# Altium PCB EMG_shield_commref.PcbDoc
Units mm, origin at the board's own origin, x right, y up, seen from the top; angles counter-clockwise.
Board outline 19.53 x 19.54 mm, 4 copper layers (Top Layer, SIG1, SIG2, Bottom Layer), stack 0.886 mm thick; 2 components, 22 nets, 90 pads, 158 vias.
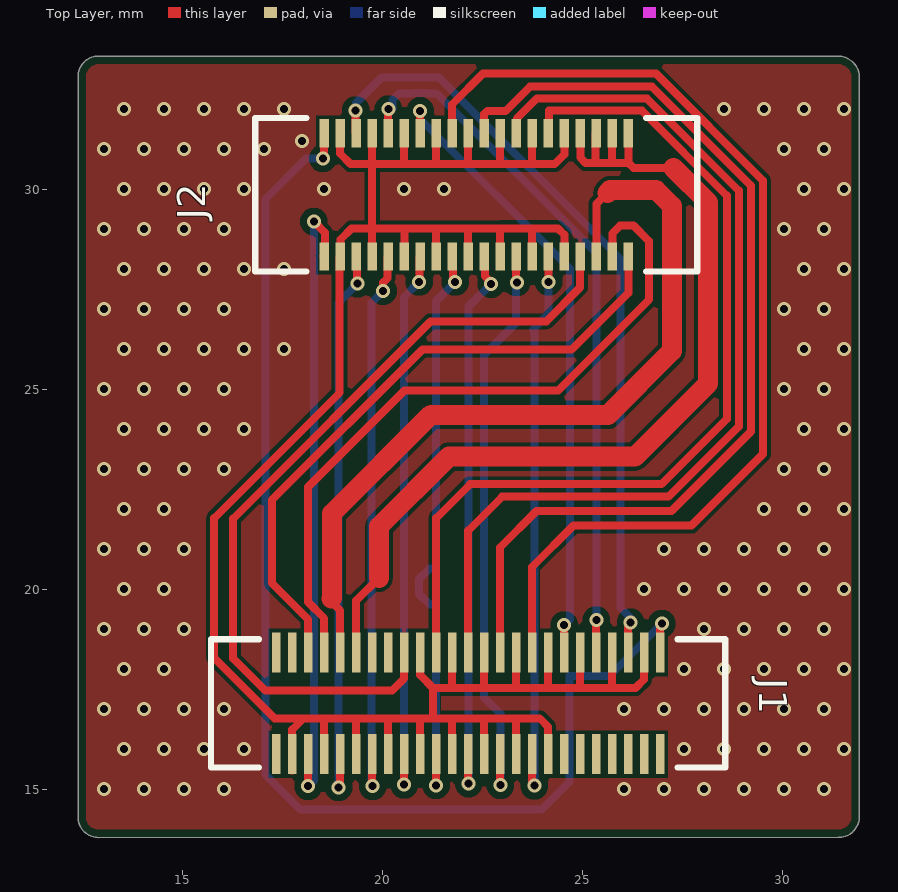
[diagram p0: Top Layer view]
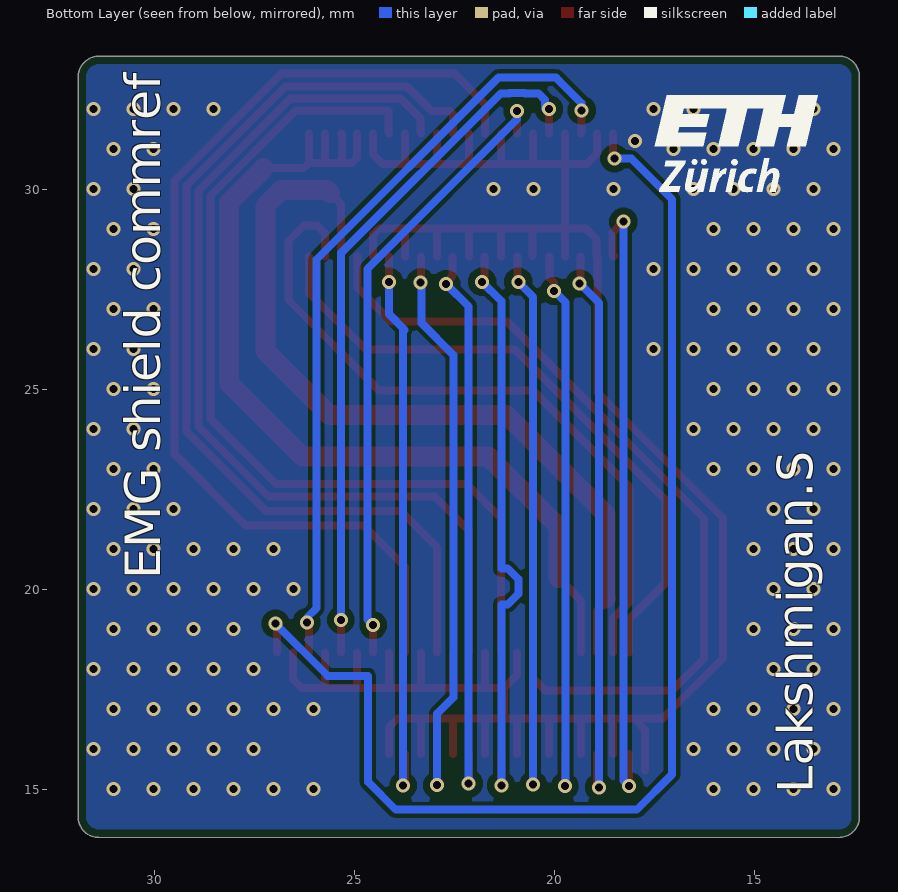
[diagram p1: Bottom Layer view, seen from below]
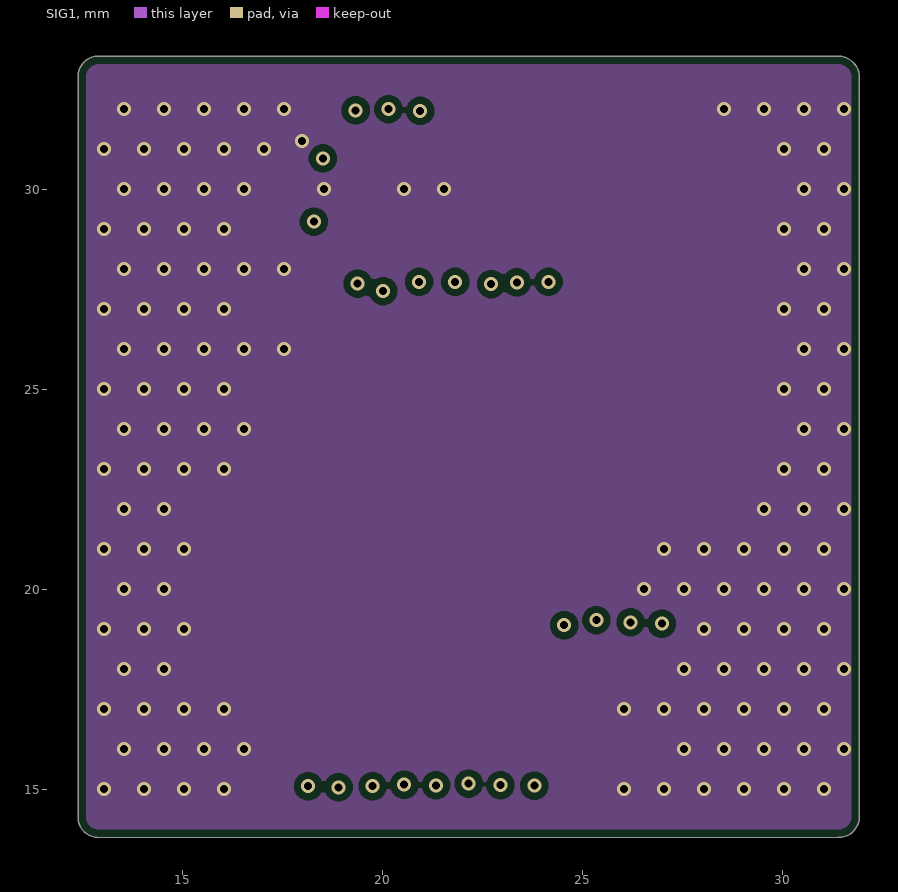
[diagram p2: SIG1]
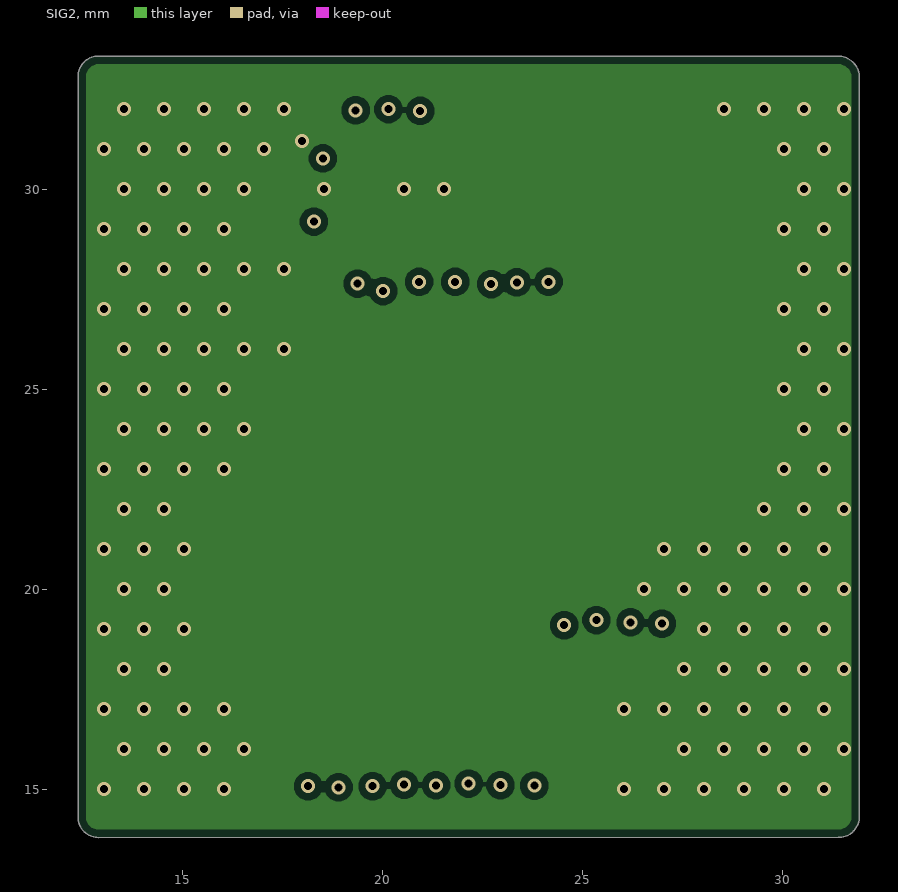
[diagram p3: SIG2]

## Layer stack, top to bottom
Top Solder: solder mask 0.0102, Solder Resist, Dk 3.5
Top Layer: signal copper 0.0175
Dielectric1: prepreg 0.13, PP-021, Dk 4.27
Dielectric2: core 0.13, Core-023, Dk 4.6
SIG1: signal copper 0.0356
Dielectric 1: prepreg 0.13, PP-021, Dk 4.27
Dielectric 2: prepreg 0.13, PP-021, Dk 4.27
SIG2: signal copper 0.0356
Dielectric 3: core 0.13, Core-023, Dk 4.6
Dielectric 4: prepreg 0.13, PP-021, Dk 4.27
Bottom Layer: signal copper 0.0175
Board Layer Stack Bottom Solder: solder mask 0.0102, Solder Resist, Dk 3.5

## Board outline
12.388,32.822 cw(c12.9,32.822) 12.9,33.334 31.389,33.334 cw(c31.389,32.803) 31.92,32.802 31.92,14.314 cw(c31.402,14.317) 31.399,13.799 12.9,13.797 cw(c12.896,14.304) 12.388,14.3

## Design rules (kind name [scope] priority, off if disabled: settings)
BoardOutlineClearance [All] p1: gap=0.2 ignorepadtopadclearanceinfootprint=FALSE
Clearance [All] p1: gap=0.102 ignorepadtopadclearanceinfootprint=FALSE except(0.127: Arc-Via Track-Via SMDPad-Via THPad-Via Via-Via Via-Fill Via-Poly Via-Region Via-Text; 0.25: Arc-Hole Track-Hole SMDPad-Hole THPad-Hole Via-Hole Fill-Hole Poly-Hole Region-Hole Text-Hole)
ComponentClearance [All] p1: gap=0.102 collisioncheckmode=3 verticalgap=0.102 showdistances=TRUE
DiffPairsRouting [All] p1: maxlimit=0.102 minlimit=0.102 mostfreqgap=0.102 toplayer_minwidth=0.102 toplayer_maxwidth=1816.048 toplayer_prefwidth=0.102 midlayer1_minwidth=0.102 midlayer1_maxwidth=1816.048 midlayer1_prefwidth=0.102 midlayer2_minwidth=0.102 midlayer2_maxwidth=1816.048 midlayer2_prefwidth=0.102 bottomlayer_minwidth=0.102 bottomlayer_maxwidth=1816.048 bottomlayer_prefwidth=0.102 maxuncoupledlength=12.7
Height [All] p1: minheight=0 maxheight=1816.048 prefheight=12.7
HoleSize [All] p1: absolutevalues=TRUE maxlimit=6.3 minlimit=0.2 maxpercent=80.000 minpercent=20.000
HoleToHoleClearance [All] p1: gap=0.25 allowstackedmicrovias=FALSE
MinimumAnnularRing [All] p1: minimumring=0.074
MinimumSolderMaskSliver [All] p1: minsoldermaskwidth=0
PlaneClearance [All] p1: clearance=0.102
PlaneConnect PlaneConnectPowerPads [InPadClass('PowerPads')] p1: planeconnectstyle=Direct reliefexpansion=0.508 reliefentries=4 reliefconductorwidth=0.254 reliefairgap=0.254
PlaneConnect [All] p2: pad.planeconnectstyle=Relief pad.reliefexpansion=0.3 pad.reliefentries=4 pad.reliefconductorwidth=0.102 pad.reliefairgap=0.102 via.planeconnectstyle=Direct via.reliefexpansion=0.3 via.reliefentries=4 via.reliefconductorwidth=0.127 via.reliefairgap=0.127
PolygonConnect PolygonConnectPowerPads [All vs (InPadClass('PowerPads'))] p1: connectstyle=Direct reliefconductorwidth=0.254 reliefentries=4 polygonreliefangle="90 Angle" airgapwidth=0.254
PolygonConnect [All] p2: thpad.connectstyle=Relief thpad.reliefconductorwidth=0.102 thpad.reliefentries=4 thpad.polygonreliefangle="90 Angle" thpad.airgapwidth=0.102 smdpad.connectstyle=Relief smdpad.reliefconductorwidth=0.102 smdpad.reliefentries=4 smdpad.polygonreliefangle="90 Angle" smdpad.airgapwidth=0.102 via.connectstyle=Direct via.reliefconductorwidth=0.127 via.reliefentries=4 via.polygonreliefangle="90 Angle" via.airgapwidth=0.127
RoutingVias [All] p1: holewidth=0.2 width=0.35 viastyle="Through Hole" minholewidth=0.2 minwidth=0.35 maxholewidth=0.2 maxwidth=0.35
SilkToSilkClearance [All] p1: silktosilkclearance=0
SilkToSolderMaskClearance [IsPad] p1: minsilkscreentomaskgap=0.102 clearancetoexposedcopper=TRUE
SolderMaskExpansion [All] p1: expansion=0.075 istentingtop=FALSE
SupplyNets "Schematic Supply Nets_1" [InNet('AGND')] p1: voltage=0.000
SupplyNets "Schematic Supply Nets" [InNet('DVDD')] p2: voltage=0.000
Width [All] p1: maxlimit=1816.048 minlimit=0.102 preferedwidth=0.102
20 further rules are at their usual default settings.

## Components (designator, comment, footprint, x,y, rotation, side; value= is the part's Value field where it differs from the comment)
J1 "DF40HC3.0-50DS-0.4V51" CONN_DF40HC3.0-50DS-0.4V51_HIR 22.143,17.153 r180 top
J2 "DF40HC3.0-40DS-0.4V51" CONN40_DF40HC-40DS_HIR 18.543,28.323 r180 top

## Footprints (in the part's own frame and the unit in brackets; to place one, negate y for a bottom-side part, rotate by r counter-clockwise, add the part's x,y. Pads: shape width x height; smd on the part's side, far side on the other; paste and mask are expansions set on the pad)
CONN40_DF40HC-40DS_HIR [mil]
  rect 9x28 smd paste+0 mask+0: 1(0,-121.26) 2(0,0) 3(-15.75,-121.26) 4(-15.75,0) 5(-31.5,-121.26) 6(-31.5,0) 7(-47.25,-121.26) 8(-47.25,0) 9(-63,-121.26) 10(-63,0) 11(-78.75,-121.26) 12(-78.75,0) 13(-94.5,-121.26) 14(-94.5,0) 15(-110.25,-121.26) 16(-110.25,0) 17(-126,-121.26) 18(-126,0) 19(-141.75,-121.26) 20(-141.75,0) 21(-157.5,-121.26) 22(-157.5,0) 23(-173.25,-121.26) 24(-173.25,0) 25(-189,-121.26) 26(-189,0) 27(-204.75,-121.26) 28(-204.75,0) 29(-220.5,-121.26) 30(-220.5,0) 31(-236.25,-121.26) 32(-236.25,0) 33(-252,-121.26) 34(-252,0) 35(-267.75,-121.26) 36(-267.75,0) 37(-283.5,-121.26) 38(-283.5,0) 39(-299.25,-121.26) 40(-299.25,0)
  silkscreen extent -367,-136 68,15, body extent -358,-127 59,6, height 114
CONN_DF40HC3.0-50DS-0.4V51_HIR [mm]
  rect 0.203x1 smd paste+0 mask+0: 1(-4.8,-1.27) 2(-4.4,-1.27) 3(-4,-1.27) 4(-3.6,-1.27) 5(-3.2,-1.27) 6(-2.8,-1.27) 7(-2.4,-1.27) 8(-2,-1.27) 9(-1.6,-1.27) 10(-1.2,-1.27) 11(-0.8,-1.27) 12(-0.4,-1.27) 13(0,-1.27) 14(0.4,-1.27) 15(0.8,-1.27) 16(1.2,-1.27) 17(1.6,-1.27) 18(2,-1.27) 19(2.4,-1.27) 20(2.8,-1.27) 21(3.2,-1.27) 22(3.6,-1.27) 23(4,-1.27) 24(4.4,-1.27) 25(4.8,-1.27) 26(4.8,1.27) 27(4.4,1.27) 28(4,1.27) 29(3.6,1.27) 30(3.2,1.27) 31(2.8,1.27) 32(2.4,1.27) 33(2,1.27) 34(1.6,1.27) 35(1.2,1.27) 36(0.8,1.27) 37(0.4,1.27) 38(0,1.27) 39(-0.4,1.27) 40(-0.8,1.27) 41(-1.2,1.27) 42(-1.6,1.27) 43(-2,1.27) 44(-2.4,1.27) 45(-2.8,1.27) 46(-3.2,1.27) 47(-3.6,1.27) 48(-4,1.27) 49(-4.4,1.27) 50(-4.8,1.27)
  silkscreen extent -6.43,-1.6 6.43,1.6, body extent -6.3,-1.7 6.3,1.68, height 2.9

## Part data
J1 J2: "No Description Available", Mfr_Name=Hirose, RefDes=RefDes
  J1: Type=Type
  J2: Type="Arrays, Edge Type, Mezzanine (Board to Board)"

## Via types
v1: diameter 0.35, hole 0.2, Top Layer to Bottom Layer, tented both sides, 158 vias

## Nets (pads, with @x,y where several pads share a name; then routed paths per layer and width w, separated by ;. In a path a pad name is that pad's centre, name@x,y a point inside that pad or via, vN(x,y) a via of type N, cw(c..) or ccw(c..) an arc to the next point about the centre after c; other vN are vias at no path point)
AGND: J1.17 J2.34 | length 20.7
  Top Layer w0.2: J1.17 20.543,17.772 20.242,17.47 17.071,17.47 16.267,18.274 16.267,21.768 21.2,26.701 24.095,26.701 24.94,27.545 24.94,28.319 J2.34
  other v1: 13.037,15.008 14.037,15.008 15.037,15.008 16.037,15.008 26.037,15.008 27.037,15.008 28.037,15.008 29.037,15.008 30.037,15.008 31.037,15.008 13.537,16.008 14.537,16.008 15.537,16.008 16.537,16.008 27.537,16.008 28.537,16.008 29.537,16.008 30.537,16.008 31.537,16.008 13.037,17.008 14.037,17.008 15.037,17.008 16.037,17.008 26.037,17.008 27.037,17.008 28.037,17.008 29.037,17.008 30.037,17.008 31.037,17.008 13.537,18.008 14.537,18.008 27.537,18.008 28.537,18.008 29.537,18.008 30.537,18.008 31.537,18.008 13.037,19.008 14.037,19.008 15.037,19.008 28.037,19.008 29.037,19.008 30.037,19.008 31.037,19.008 13.537,20.008 14.537,20.008 26.537,20.008 27.537,20.008 28.537,20.008 29.537,20.008 30.537,20.008 31.537,20.008 13.037,21.008 14.037,21.008 15.037,21.008 27.037,21.008 28.037,21.008 29.037,21.008 30.037,21.008 31.037,21.008 13.537,22.008 14.537,22.008 29.537,22.008 30.537,22.008 31.537,22.008 13.037,23.008 14.037,23.008 15.037,23.008 16.037,23.008 30.037,23.008 31.037,23.008 13.537,24.008 14.537,24.008 15.537,24.008 16.537,24.008 30.537,24.008 31.537,24.008 13.037,25.008 14.037,25.008 15.037,25.008 16.037,25.008 30.037,25.008 31.037,25.008 13.537,26.008 14.537,26.008 15.537,26.008 16.537,26.008 17.537,26.008 30.537,26.008 31.537,26.008 13.037,27.008 14.037,27.008 15.037,27.008 16.037,27.008 30.037,27.008 31.037,27.008 13.537,28.008 14.537,28.008 15.537,28.008 16.537,28.008 17.537,28.008 30.537,28.008 31.537,28.008 13.037,29.008 14.037,29.008 15.037,29.008 16.037,29.008 30.037,29.008 31.037,29.008 13.537,30.008 14.537,30.008 15.537,30.008 16.537,30.008 18.537,30.008 20.537,30.008 21.537,30.008 30.537,30.008 31.537,30.008 13.037,31.008 14.037,31.008 15.037,31.008 16.037,31.008 17.037,31.008 30.037,31.008 31.037,31.008 17.992,31.213 13.537,32.008 14.537,32.008 15.537,32.008 16.537,32.008 17.537,32.008 28.537,32.008 29.537,32.008 30.537,32.008 31.537,32.008
BIAS: J1.20 J2.33 J2.35 J2.37 J2.39 | length 24.1
  Top Layer w0.2: J1.20 19.343,19.721 19.911,20.289 ; J2.33 24.944,30.795 25.077,30.662 25.326,30.662 ; J2.35 25.326,31.385 25.326,30.662 ; J2.37 25.741,31.4 25.741,30.662 ; J2.39 26.149,31.398 26.149,30.662 ; 27.28,30.532 26.279,30.532 26.149,30.662 ; 25.326,30.662 25.741,30.662 ; 25.741,30.662 26.149,30.662
  Top Layer w0.5: 19.911,20.289 19.911,21.571 21.658,23.319 26.312,23.319 28.141,25.147 28.141,29.671 27.28,30.532
DVDD: J1.21 J2.36 | length 20.9
  Top Layer w0.2: 18.724,19.769 18.724,19.691 18.943,19.472 J1.21 ; J2.36 25.344,29.637 25.619,29.913
  Top Layer w0.5: 18.724,19.769 18.738,19.783 18.738,21.897 21.207,24.366 25.643,24.366 27.24,25.963 27.24,29.587 26.839,29.987 25.693,29.987 25.619,29.913
I2C_A_SCL: J1.22 J2.38 | length 18
  Top Layer w0.2: J1.22 18.543,19.277 18.136,19.684 18.136,22.558 20.548,24.97 24.393,24.97 26.665,27.242 26.665,28.706 26.276,29.095 25.943,29.095 25.744,28.896 J2.38
I2C_A_SDA: J1.23 J2.40 | length 16.2
  Top Layer w0.2: J1.23 18.143,19.25 17.232,20.162 17.232,22.232 20.997,25.997 24.73,25.997 26.144,27.411 J2.40
NetJ1_1: J1.1 J2.1 | length 31.4
  Top Layer w0.2: v1(18.509,30.773) 18.534,30.798 18.543,30.798 J2.1 ; J1.1 26.943,19.104 v1(26.983,19.144)
  Bottom Layer w0.2: v1(18.509,30.773) 18.089,30.773 17.07,29.753 17.07,15.375 17.953,14.492 23.977,14.492 24.674,15.189 24.674,17.841 25.68,17.841 v1(26.983,19.144)
NetJ1_2: J1.2 J1.4 J1.6 J1.8 J1.10 J1.12 J1.14 J1.16 J1.27 J1.29 J1.31 J1.33 J1.35 J1.37 J1.39 J1.41 J1.43 J2.3 J2.4 J2.7 J2.8 J2.11 J2.12 J2.15 J2.16 J2.19 J2.20 J2.23 J2.24 J2.27 J2.28 J2.31 J2.32 | length 65.9
  Top Layer w0.2: J1.27@17.743,15.477 J1.27 17.743,16.492 18.028,16.777 ; J1.29 18.543,16.777 ; J2.4@18.929,28.309 18.929,24.918 15.792,21.781 15.792,18.285 17.301,16.777 18.028,16.777 ; J2.4 J2.4@18.957,28.337 ; J2.3 18.943,30.893 19.201,30.635 19.743,30.635 ; J2.4@18.955,28.335 18.955,28.754 19.224,29.023 19.742,29.023 ; J1.31 19.343,16.777 ; J2.8 19.743,29.022 ; J2.7 19.743,30.635 ; J1.33 20.143,16.777 ; J2.11 20.543,30.635 ; J2.12@20.556,28.336 20.556,29.023 ; J1.35 20.943,16.777 ; J1.16 20.943,17.858 21.265,17.536 ; J2.16 21.343,29.023 ; J2.15 21.343,30.635 ; J1.37 21.743,16.777 ; J1.14 21.743,17.536 ; J2.20 22.143,29.01 22.156,29.023 ; J2.19 22.143,30.657 22.165,30.635 ; J1.39 22.543,16.777 ; J1.12 22.543,17.536 ; J2.24 22.943,29.002 22.923,29.023 ; J2.23 22.943,30.635 ; J1.41 23.343,16.769 23.351,16.777 ; J1.10 23.343,17.536 ; J2.28 23.743,29.02 23.746,29.023 ; J2.27 23.743,30.635 ; J1.43 24.143,16.563 23.93,16.777 23.351,16.777 ; J1.8 24.143,17.536 ; J2.32 24.544,28.868 24.389,29.023 23.746,29.023 ; J2.31 24.544,30.873 24.305,30.635 23.743,30.635 ; J1.6 24.943,17.536 ; J1.4 25.743,17.536 ; J1.2 26.543,17.752 26.328,17.536 25.743,17.536 ; 18.028,16.777 18.543,16.777 ; 18.543,16.777 19.343,16.777 ; 19.343,16.777 20.143,16.777 ; 19.742,29.023 20.556,29.023 ; 19.743,29.023 19.743,30.635 ; 19.743,30.635 20.543,30.635 ; 20.143,16.777 20.943,16.777 ; 20.543,30.635 21.343,30.635 ; 20.556,29.023 21.343,29.023 ; 20.943,16.777 21.314,16.777 ; 21.265,17.536 21.265,16.826 21.314,16.777 ; 21.265,17.536 21.743,17.536 ; 21.314,16.777 21.743,16.777 ; 21.343,29.023 22.156,29.023 ; 21.343,30.635 22.943,30.635 ; 21.743,16.777 22.543,16.777 ; 21.743,17.536 22.543,17.536 ; 22.156,29.023 22.923,29.023 ; 22.543,16.777 23.351,16.777 ; 22.543,17.536 23.343,17.536 ; 22.923,29.023 23.746,29.023 ; 22.943,30.635 23.743,30.635 ; 23.343,17.536 24.143,17.536 ; 24.143,17.536 24.943,17.536 ; 24.943,17.536 25.743,17.536
NetJ1_3: J1.3 J2.5 | length 19.5
  Top Layer w0.2: v1(19.329,31.979) 19.329,31.417 J2.5 ; J1.3 26.143,19.119 v1(26.201,19.177)
  Bottom Layer w0.2: v1(19.329,31.979) 19.322,31.972 19.339,31.955 19.339,32.164 19.901,32.726 19.975,32.8 21.408,32.8 25.954,28.254 25.954,19.538 26.201,19.291 v1(26.201,19.177)
NetJ1_5: J1.5 J2.9 | length 17.7
  Top Layer w0.2: J2.9 20.143,32.002 v1(20.149,32.008) ; J1.5 25.343,19.23 v1(25.347,19.234)
  Bottom Layer w0.2: v1(20.149,32.008) 20.235,32.008 20.245,32.018 20.245,32.238 20.41,32.404 20.75,32.404 20.757,32.411 21.129,32.411 21.136,32.404 21.35,32.404 25.347,28.407 v1(25.347,19.234)
NetJ1_7: J1.7 J2.13 | length 15.7
  Top Layer w0.2: J2.13 v1(20.943,31.961) ; J1.7 24.543,19.079 24.536,19.086 24.536,19.099 v1(24.543,19.106)
  Bottom Layer w0.2: v1(20.943,31.961) 20.943,31.756 24.684,28.015 24.684,19.246 v1(24.543,19.106)
NetJ1_9: J1.9 J2.17 | length 25.8
  Top Layer w0.2: J2.17 21.743,32.129 22.509,32.894 26.836,32.894 29.512,30.218 29.512,23.384 27.727,21.6 24.778,21.6 23.743,20.565 J1.9
NetJ1_11: J1.11 J2.21 | length 24.7
  Top Layer w0.2: J2.21 22.543,31.879 22.624,31.96 23.08,31.96 23.693,32.572 26.731,32.572 29.21,30.094 29.21,23.948 27.222,21.961 23.852,21.961 22.943,21.052 J1.11
NetJ1_13: J1.13 J2.25 | length 23.9
  Top Layer w0.2: J1.13 22.143,21.469 22.993,22.318 27.153,22.318 28.908,24.073 28.908,29.969 26.606,32.271 23.856,32.271 23.358,31.772 23.358,31.417 J2.25
NetJ1_15: J1.15 J2.29 | length 23.1
  Top Layer w0.2: J1.15 21.343,21.781 22.192,22.629 26.974,22.629 28.607,24.262 28.607,29.844 26.481,31.969 24.158,31.969 24.158,31.417 J2.29
NetJ1_28: J1.28 J2.2 | length 16
  Top Layer w0.2: v1(18.142,15.079) J1.28 J1.28 ; v1(18.284,29.195) 18.56,28.919 18.56,28.375 18.525,28.34 J2.2
  Bottom Layer w0.2: v1(18.142,15.079) 18.284,15.221 v1(18.284,29.195)
NetJ1_30: J1.30 J2.6 | length 14.3
  Top Layer w0.2: v1(18.9,15.053) 18.943,15.097 J1.30 ; J2.6 19.357,28.309 19.357,27.668 v1(19.379,27.645)
  Bottom Layer w0.2: v1(18.9,15.053) 18.9,27.166 v1(19.379,27.645)
NetJ1_32: J1.32 J2.10 | length 14.2
  Top Layer w0.2: v1@19.743,15.09 J1.32 ; v1(20.017,27.46) 20.017,27.673 20.129,27.784 20.129,28.309 J2.10
  Bottom Layer w0.2: v1(19.752,15.081) 19.752,15.138 19.729,15.162 19.729,27.172 v1(20.017,27.46)
NetJ1_34: J1.34 J2.14 | length 14.1
  Top Layer w0.2: v1(20.543,15.117) J1.34 ; v1(20.915,27.688) 20.929,27.702 20.929,28.309 J2.14
  Bottom Layer w0.2: v1(20.543,15.117) 20.543,27.315 v1(20.915,27.688)
NetJ1_36: J1.36 J2.18 | length 14.8
  Top Layer w0.2: v1(21.339,15.103) 21.339,15.878 J1.36 ; J2.18 21.757,28.309 21.757,27.789 21.818,27.728 v1(21.818,27.688)
  Bottom Layer w0.2: v1(21.339,15.103) 21.339,19.622 21.179,19.622 20.915,19.886 20.915,20.259 21.179,20.522 21.339,20.522 21.339,27.208 v1(21.818,27.688)
NetJ1_38: J1.38 J2.22 | length 14.2
  Top Layer w0.2: J1.38 22.143,15.157 v1(22.153,15.147) ; J2.22@22.555,28.311 22.558,28.309 22.558,27.837 22.718,27.676 v1(22.718,27.635)
  Bottom Layer w0.2: v1(22.153,15.147) 22.153,27.07 v1(22.718,27.635)
NetJ1_40: J1.40 J2.26 | length 14.5
  Top Layer w0.2: J1.40 22.943,15.109 v1(22.948,15.105) ; J2.26 23.343,27.688 v1(23.357,27.675)
  Bottom Layer w0.2: v1(22.948,15.105) 22.948,16.893 22.54,17.301 22.54,25.86 23.337,26.657 23.337,27.655 v1(23.357,27.675)
NetJ1_42: J1.42 J2.30 | length 14.2
  Top Layer w0.2: J1.42 23.743,15.144 v1(23.794,15.093) ; J2.30 24.15,28.316 v1(24.15,27.688)
  Bottom Layer w0.2: v1(23.794,15.093) 23.794,26.452 23.757,26.489 24.15,26.882 v1(24.15,27.688)
pads on no net: J1.18 J1.19 J1.24 J1.25 J1.26 J1.44 J1.45 J1.46 J1.47 J1.48 J1.49 J1.50

## Polygon pours and split planes (outlines as drawn)
AGND on SIG2 "AGND_L03_P003" (solid, pour order 3): 9.625,12.925 34.069,12.925 34.056,34.488 9.625,34.5
AGND on SIG1 "AGND_L02_P002" (solid, pour order 2): 9.2,34.6 9.2,12.025 34.75,12.025 34.75,34.575 34.775,34.6 9.175,34.6
AGND on Top Layer "AGND_L01_P000" (solid, pour order 0): 9.875,12.65 9.875,34.175 34.2,34.175 34.2,12.675 34.2,12.65
AGND on Bottom Layer "AGND_L04_P004" (solid, pour order 4): 9.975,34.625 9.975,13 9.95,12.975 34.025,12.975 34.025,34.575 9.9,34.575

## Silkscreen, mask and mechanical layers (free items; w line width, h text height)
Board Layer Stack Bottom Overlay:
  drawing of 10 lines, arcs and shapes, not listed
  text "EMG shield commref" at 29.566,20.257 h1.52 r270
  text "Lakshmigan.S" at 13.258,14.898 h1.52 r270
Mechanical 1:
  text ".Pcb_File_Name_No_Path" at 0,-2.5 h1.52